# Allegro board bridge rectifier.brd
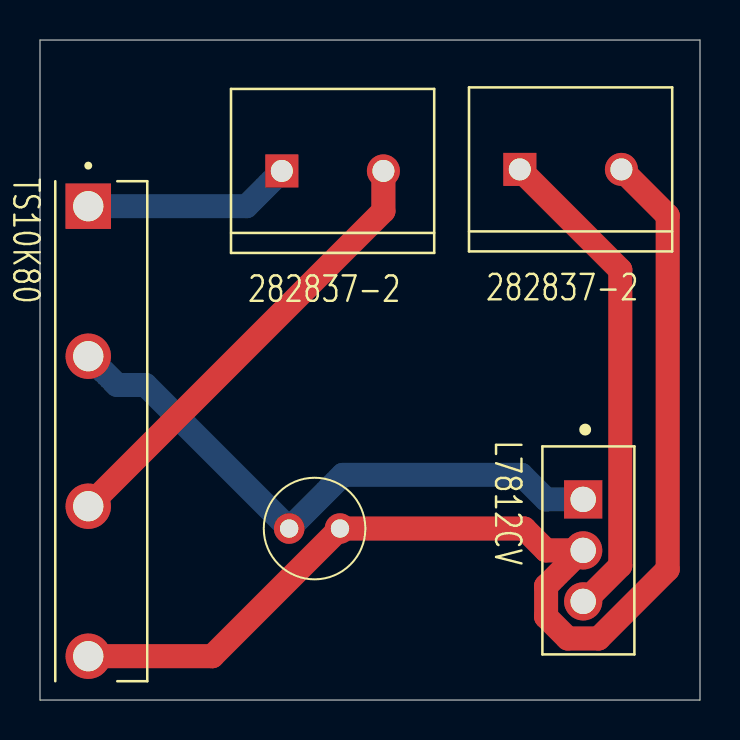
[diagram p0: board, top side]
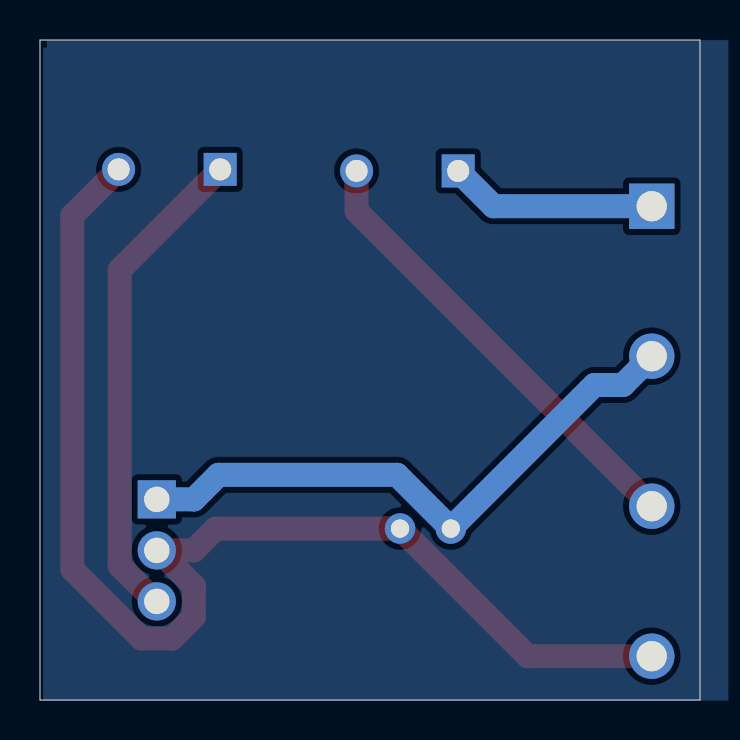
[diagram p1: board, bottom side, seen from below]

Outline 33 x 33 mm; copper layers: TOP, BOTTOM. Coordinates in mm from the lower left corner of the outline.
Outline path: 0,33 33,33 33,0 0,0 0,33

## Design rules (mm)
constraint set DEFAULT: min track width 1.2

## Placement (name value [footprint] x y rotation side)
C1  1000uF  [CAP196]  12.46 8.57 270 top
D1  GBU406  [DIOB_TS10K80]  2.41 24.69 270 top
P1  Power 16VAC  [TE_282837-2]  14.63 26.45 0 top
P2  12 DC  [TE_282837-2]  26.53 26.53 0 top
U1  L7812CV  [TO-220-3]  27.42 7.48 270 top

## Library data of the parts
C1 = CAPACITOR: Tolerance: ***; User Part Number: ***
D1 = MB152W
P1 P2 = 282837-2
U1 = L7812CV

## Footprints (pads in the part's own frame, mm; a bottom-side part is the same pattern mirrored in y, then rotated)
CAP196
  round 1.524 hole 0.914: 1(0,0) 2(0,2.54)
DIOB_TS10K80
  rect 2.27x2.27 hole 1.51: 1(0,0)
  round 2.27 hole 1.51: 2(7.5,0) 3(15,0) 4(22.5,0)
TE_282837-2
  rect 1.65x1.65 hole 1.1: 1(-2.54,0)
  round 1.65 hole 1.1: 2(2.54,0)
TO-220-3
  rect 1.91x1.91 hole 1.27: 1(-2.55,-0.26)
  round 1.91 hole 1.27: 2(0,-0.26) 3(2.55,-0.26)

## Nets
N00182: D1.1 P1.1
N00200: D1.3 P1.2
N00233: C1.1 D1.2(DC OUT PLUS) U1.1
N00251: C1.2 D1.4 P2.2 U1.2
N00263: P2.1 U1.3(OUT)

## Routing (per net, layer and track width the routed paths; a pad name or vN(x,y) marks a point on that pad's centre or on a via; arc(x,y) is an arc through that point)
N00182: length 10.4
  BOTTOM w1.2: D1.1 10.33,24.69 P1.1
N00200: length 22.9
  TOP w1.2: P1.2 17.17,24.45 2.41,9.69
N00233: length 29.9
  BOTTOM w1.2: 2.41,17.19 3.85,15.75 5.28,15.75 C1.1 15.14,11.26 24.08,11.26 25.3,10.03 U1.1
N00251: length 60.8
  TOP w1.2: 2.41,2.19 8.62,2.19 C1.2 24.21,8.57 25.3,7.48 27.09,7.48 ; 27.09,7.48 U1.2 ; 27.09,7.48 25.3,5.7 25.3,4.16 26.39,3.08 27.93,3.08 31.39,6.53 31.39,24.22 P2.2
N00263: length 24.5
  TOP w1.2: U1.3 27.23,4.93 29.01,6.71 29.01,21.51 P2.1

## Copper pours and planes (outline as drawn; the poured copper is in the pictures)
Net_1 on BOTTOM: 32.84,32.99 32.84,-0.03 -1.42,-0.03 -1.42,32.99

Small or netless copper shapes (teardrops, artwork), in the pictures only: 1 on BOTTOM
